# Altium PCB rpi_shield.PcbDoc
Units mm, origin at the board's own origin, x right, y up, seen from the top; angles counter-clockwise.
Board outline 56 x 65 mm, 2 copper layers (Top Layer, Bottom Layer); 18 components, 10 nets, 98 pads, 21 vias.
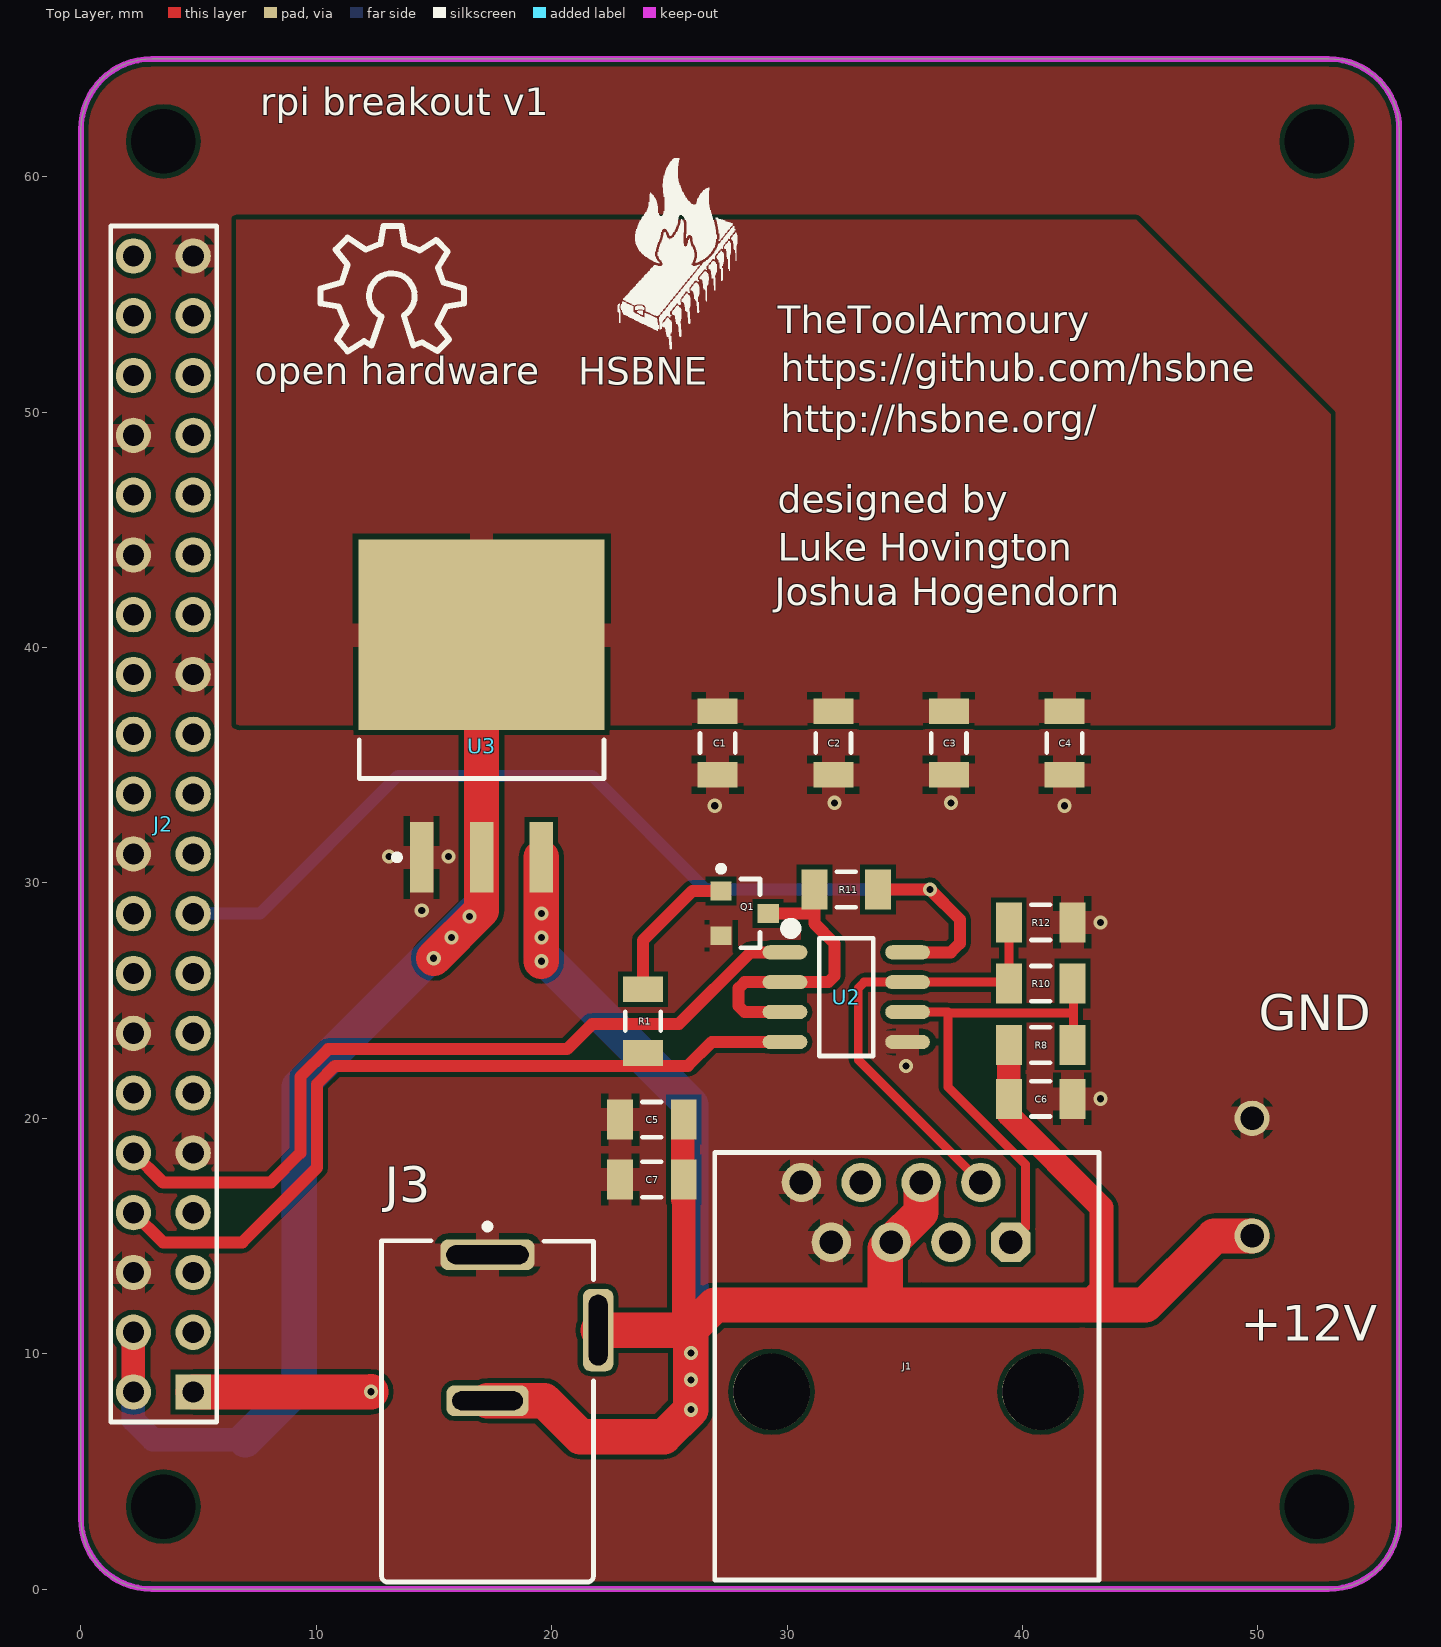
[diagram p0: Top Layer view]
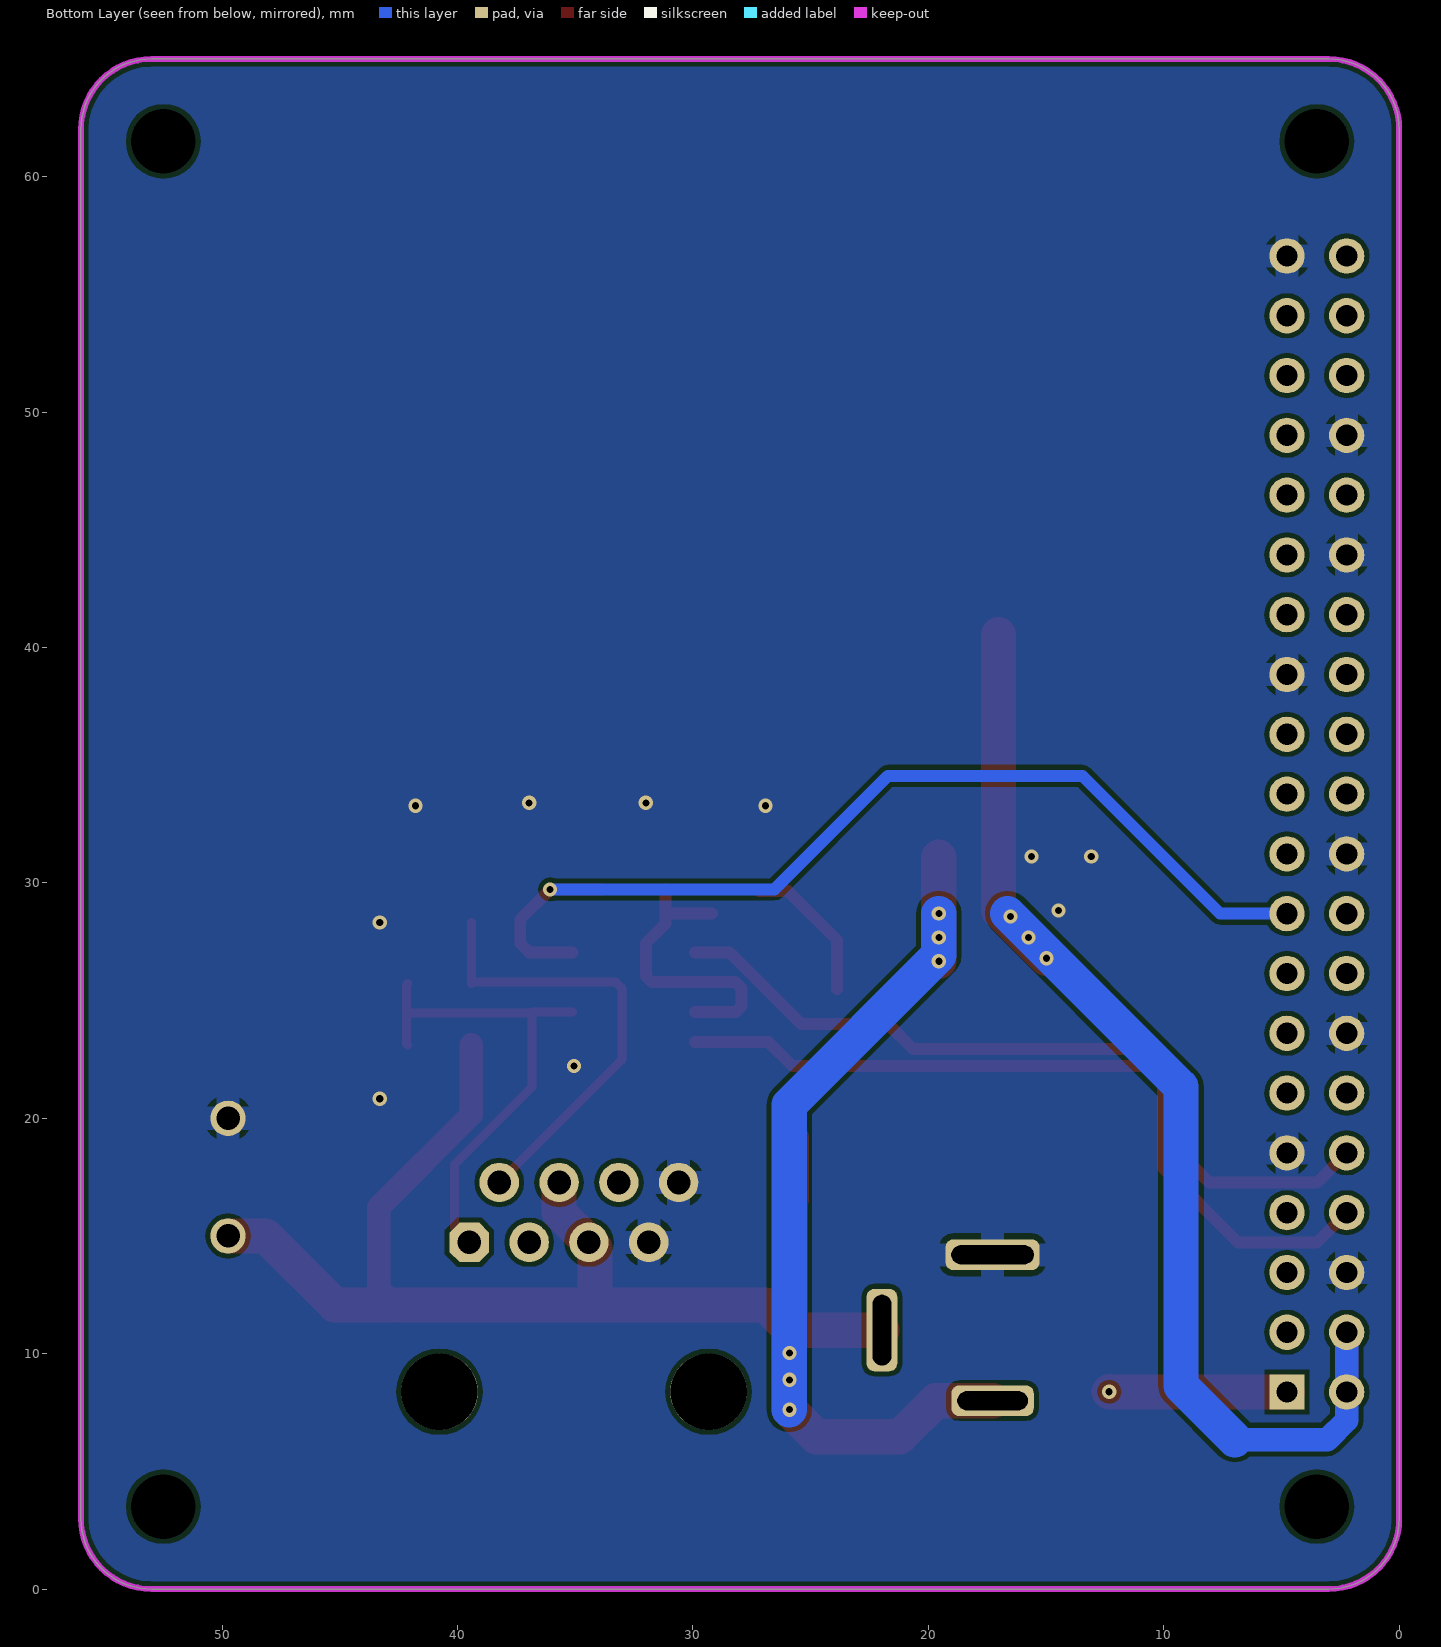
[diagram p1: Bottom Layer view, seen from below]

## Layer stack, top to bottom
Top Solder: solder mask 0.0102, Solder Resist, Dk 3.5
Top Layer: signal copper 0.0356
Dielectric1: dielectric 0.32, FR-4, Dk 4.8
Bottom Layer: signal copper 0.0356
Bottom Solder: solder mask 0.0102, Solder Resist, Dk 3.5

## Board outline
3,0 cw(c3,3) 0,3 0,62 cw(c3,62) 3,65 53,65 cw(c53,62) 56,62 56,3 cw(c53,3) 53,0

## Design rules (kind name [scope] priority, off if disabled: settings)
Clearance [All] p1: gap=0.2
DiffPairsRouting [All] p1: maxlimit=0.254 minlimit=0.254 mostfreqgap=0.254 toplayer_minwidth=0.381 toplayer_maxwidth=0.381 toplayer_prefwidth=0.381 bottomlayer_minwidth=0.381 bottomlayer_maxwidth=0.381 bottomlayer_prefwidth=0.381 maxuncoupledlength=12.7
HoleSize [All] p1: absolutevalues=TRUE maxlimit=4 minlimit=0.3 maxpercent=80.000 minpercent=20.000
MatchedLengths [InDifferentialPair('RS485')] p1: tolerance=2 checknetsindiffpair=FALSE checkdiffpairvsdiffpair=TRUE checkxsignals=TRUE checkothers=TRUE
MinimumSolderMaskSliver [(InComponent('U1') OR InComponent('U4') OR InComponent('Y1'))] p1: minsoldermaskwidth=0.045
MinimumSolderMaskSliver MinimumSolderMaskSliver_1 [All] p2: minsoldermaskwidth=0.25
PolygonConnect PolygonConnect_1 [isvia] p1: connectstyle=Direct reliefconductorwidth=0.254 reliefentries=4 polygonreliefangle="90 Angle" airgapwidth=0.254
PolygonConnect [All] p2: connectstyle=Relief reliefconductorwidth=1 reliefentries=4 polygonreliefangle="90 Angle" airgapwidth=0.254
RoutingVias [All] p1: holewidth=0.3 width=0.5 viastyle="Through Hole" minholewidth=0.2 minwidth=0.5 maxholewidth=0.711 maxwidth=1.27
SilkToSolderMaskClearance [IsPad] p1 off: minsilkscreentomaskgap=0.254 clearancetoexposedcopper=TRUE
SolderMaskExpansion [All] p1: expansion=0.102
Width [All] p1: maxlimit=1.5 minlimit=0.254 preferedwidth=0.508 minimp=50.000000 maximp=50.000000 favimp=50.000000
26 further rules are at their usual default settings.

## Classes and differential pairs
differential pair RS485: +RS485_P -RS485_N

## Components (designator, comment, footprint, x,y, rotation, side; value= is the part's Value field where it differs from the comment)
C1 "100nF" C1206 27.051,35.941 r90 top
C2 "100nF" C1206 31.962,35.941 r90 top
C3 "100nF" C1206 36.872,35.941 r90 top
C4 "1uF" C1206 41.783,35.941 r90 top
C5 "1uF" C1206 24.257,19.939 r0 top
C6 "100nF" C1206 40.767,20.828 r180 top
C7 "100nF" C1206 24.257,17.399 r0 top
J1 "rs485" RJ45 35.052,8.382 r0 top
J2 "rpi" 2x20 4.77,8.37 r180 top locked
J3 "KLDX-0202-A" KYCN-KLDX-0202-A_V 17.272,8.001 r270 top
Q1 "BSS123LT3G" ONSC-SOT-23-3-318-08_V 28.194,28.702 r0 top
R1 "10K" C1206 23.876,24.13 r270 top
R8 "390R" C1206 40.767,23.114 r180 top
R10 "220R" C1206 40.767,25.717 r0 top
R11 "10K" C1206 32.512,29.718 r0 top
R12 "390R" C1206 40.767,28.321 r180 top
U2 "MAX14770EESA+" 8S1_L 32.512,25.146 r0 top
U3 "LM1085ISX-5.0" TS3B_L 17.018,37.084 r90 top

## Footprints (in the part's own frame and the unit in brackets; to place one, negate y for a bottom-side part, rotate by r counter-clockwise, add the part's x,y. Pads: shape width x height; smd on the part's side, far side on the other; paste and mask are expansions set on the pad)
2x20 [mm]
  rect 1.5x1.5 hole 0.9: 1(0,0)
  round 1.5 hole 0.9: 2(2.54,0) 3(0,-2.54) 4(2.54,-2.54) 5(0,-5.08) 6(2.54,-5.08) 7(0,-7.62) 8(2.54,-7.62) 9(0,-10.16) 10(2.54,-10.16) 11(0,-12.7) 12(2.54,-12.7) 13(0,-15.24) 14(2.54,-15.24) 15(0,-17.78) 16(2.54,-17.78) 17(0,-20.32) 18(2.54,-20.32) 19(0,-22.86) 20(2.54,-22.86) 21(0,-25.4) 22(2.54,-25.4) 23(0,-27.94) 24(2.54,-27.94) 25(0,-30.48) 26(2.54,-30.48) 27(0,-33.02) 28(2.54,-33.02) 29(0,-35.56) 30(2.54,-35.56) 31(0,-38.1) 32(2.54,-38.1) 33(0,-40.64) 34(2.54,-40.64) 35(0,-43.18) 36(2.54,-43.18) 37(0,-45.72) 38(2.54,-45.72) 39(0,-48.26) 40(2.54,-48.26)
  silkscreen extent -1,-49.53 3.5,1.27
8S1_L [mm] "SOIC, 8-Leads, Body 4.9x3.9mm, Pitch 1.27mm, IPC High Density"
  oval 1.9x0.6 smd: 1(-2.604,1.905) 2(-2.604,0.635) 3(-2.604,-0.635) 4(-2.604,-1.905) 5(2.604,-1.905) 6(2.604,-0.635) 7(2.604,0.635) 8(2.604,1.905)
  silkscreen extent -2.56,-2.5 1.14,3.12, body extent -2,-2.5 2,2.5, height 1.75
C1206 [mm] "Chip Capacitor, Body 3.2x1.6mm, IPC High Density"
  rect 1.1x1.7 smd: 1(-1.35,0) 2(1.35,0)
  silkscreen extent -0.4,-0.75 0.4,0.75, body extent -1.7,-0.9 1.7,0.9, height 1.3
KYCN-KLDX-0202-A_V [mm] "Power Jack, 3-Leads, Body 14.5x9mm"
  rrect50% 1.3x4 hole 0.8 slot 3.5 at 90 deg: 1(-6.2,0)
  rrect50% 1.3x3.5 hole 0.8 slot 3 at 90 deg: 2(0,0)
  rrect50% 3.5x1.3 hole 0.8 slot 3 at 0 deg: 3(-3,4.7)
  silkscreen extent -7.52,-4.5 7.7,4.5, body extent -6.8,-4.5 7.7,4.9, height 10.8
ONSC-SOT-23-3-318-08_V [mm] "SOT23, 3-Leads, Body 2.92x1.3mm, Pitch 0.95mm"
  rect 0.9x0.8 smd: 1(-1,0.95) 2(-1,-0.95) 3(1,0)
  silkscreen extent -1.12,-1.46 0.65,2.02, body extent -0.65,-1.46 0.65,1.46, height 1.11
RJ45 [mil] "609-5081-ND"
  oct 66x66 hole 39.37: 1(175.04,250)
  round 66 hole 39.37: 2(125.04,350) 3(75.04,250) 4(25.04,350) 5(-24.96,250) 6(-74.96,350) 7(-124.96,250) 8(-174.96,350)
  round 127.95 hole 127.95 unplated: ""(-225.04,0) ""(225.04,0)
  silkscreen extent -320,-315 323,400, body extent -295,-314 303,394, height 452
TS3B_L [mm] "D2-PAK, 4-Leads, Body 8.6x10.2mm, Pitch 2.54mm, Lead Span 14.2mm, IPC High Density"
  rect 3x1 smd: 1(-6,2.54) 2(-6,0) 3(-6,-2.54)
  rect 8.1x10.45 smd: 4(3.45,0)
  silkscreen extent -6.12,-5.2 -1,5.2, body extent -2.65,-5.2 6.24,5.2, height 4.64

## Part data
C1 C2 C3 C6 C7: library part "Cap 100nF", "Capacitor (Semiconductor SIM Model)"
C4 C5: library part "Cap 1uF", "Capacitor (Semiconductor SIM Model)"
J1: library part rj45, "rj45"
J2: library part rpi2, "RaspPi I/O header"
J3: library part CMP-1673-00001-5, "DC Power Jack, 24 V, 3.5 A, -25 to 85 degC, 3-Pin THD, RoHS"
Q1: library part CMP-1058-00787-1, "Power MOSFET, 170 mA, 100 V, N-Channel, 3-Pin SOT-23, Pb-Free, Tape and Reel"
R1 R11: library part Resistor-10K, "Resistor"
R8 R12: library part Resistor-390R, "Resistor"
R10: library part Resistor-220R, "Resistor"
U2: "TXRX PROFIBUS RS-485 8-SOIC"
U3: library part CMP-0062-00621-3, "3A Low Dropout Positive Regulators, 3-pin TO-263"

## Free pads (board coordinates)
  round 1.5 hole 1: 1(49.75,15) 2(49.75,20)
  round 1.524 hole 2.75 unplated: ""(3.5,3.5) ""(3.5,61.5) ""(52.5,3.5) ""(52.5,61.5)

## Via types
v1: diameter 0.6, hole 0.3, Top Layer to Bottom Layer, tented both sides, 21 vias

## Nets (pads, with @x,y where several pads share a name; then routed paths per layer and width w, separated by ;. In a path a pad name is that pad's centre, name@x,y a point inside that pad or via, vN(x,y) a via of type N, cw(c..) or ccw(c..) an arc to the next point about the centre after c; other vN are vias at no path point)
3V3: J2.17 R11.2 U2.8 | length 43.1
  Top Layer w0.508: R11.2 v1(36.068,29.718) 37.338,28.448 37.338,27.432 36.957,27.051 U2.8
  Bottom Layer w0.508: J2.17 7.608,28.69 13.462,34.544 21.717,34.544 26.543,29.718 v1(36.068,29.718)
5V: C1.2 C2.2 C3.2 C4.2 J2.2 J2.4 U3.2 U3.4 | length 52.3
  Top Layer w1: J2.2 J2.4
  Top Layer w1.5: v1(14.986,26.797) 17.018,28.829 U3.2 U3.4
  Bottom Layer w1: J2.4 J2.2 2.23,7.168 3.048,6.35 6.985,6.35
  Bottom Layer w1.5: 6.985,6.35 9.271,8.636 9.271,21.336 v1@16.637,28.702
  other v1: 15.748,27.686 16.51,28.575
12V: C5.2 C6.2 C7.2 J1.4 J1.5 J3.2 J3.3 pad.1 R8.2 U3.3 | length 97.6
  Top Layer w1: C5.2@25.572,19.185 25.572,16.545 25.607,16.51 25.607,11.35 25.908,11.049 ; R8.2 C6.2 39.417,20.146 43.354,16.209 43.354,12.747 42.672,12.065
  Top Layer w1.5: J3.2 19.685,8.001 21.209,6.477 24.765,6.477 v1(25.908,7.62) v1(25.908,8.89) v1(25.908,10.033) 25.908,11.049 ; v1(19.558,26.67) v1(19.558,27.686) v1(19.558,28.702) U3.3 ; J3.3 25.86,11.001 25.908,11.049 ; 35.688,12.066 35.687,12.065 ; J1.4 35.688,16.002 J1.5 34.163,14.477 34.163,12.065 ; 42.418,12.065 35.687,12.065 ; 42.672,12.065 45.212,12.065 48.147,15 pad.1 ; 25.908,11.049 26.924,12.065 34.163,12.065 ; 34.163,12.065 35.687,12.065
  Bottom Layer w1.5: v1(19.558,28.702) v1(19.558,27.686) 19.558,26.924 25.908,20.574 v1(25.908,10.033) v1(25.908,8.89) v1(25.908,7.62)
COM_TR: Q1.3 R11.1 U2.2 U2.3 | length 13.1
  Top Layer w0.508: Q1.3 31.162,28.702 ; U2.3 28.194,24.511 27.94,24.765 27.94,25.527 28.194,25.781 U2.2 31.75,25.781 32.004,26.035 32.004,27.432 31.162,28.274 31.162,28.702 ; R11.1 31.162,28.702
GND: C1.1 C2.1 C3.1 C4.1 C5.1 C6.1 C7.1 J1.7 J1.8 J2.6 J2.9 J2.14 J2.20 J2.25 J2.30 J2.34 J2.39 J3.1 pad.2 Q1.2 R12.1 U2.5 U3.1
  other v1: 43.307,20.828 35.052,22.225 43.307,28.321 14.478,28.829 13.081,31.115 15.621,31.115 26.924,33.274 41.783,33.274 32.004,33.401 36.957,33.401
NetQ1_1: Q1.1 R1.1 | length 6.3
  Top Layer w0.508: R1.1 23.876,27.559 25.969,29.652 Q1.1
RS485_N: J1.1 R8.1 R10.2 U2.6 | length 21.2
  Top Layer w0.381: U2.6 36.83,24.511 ; J1.1 40.132,15.366 40.132,18.034 36.83,21.336 36.83,24.511 ; R8.1 42.164,23.161 42.164,24.384 ; R10.2 42.164,25.67 42.164,24.384 ; 36.83,24.511 36.864,24.477 42.071,24.477 42.164,24.384
RS485_P: J1.2 R10.1 R12.2 U2.7 | length 19.5
  Top Layer w0.381: J1.2 33.02,22.48 33.02,25.527 33.274,25.781 U2.7 39.353,25.781 R10.1 R12.2
RXD: J2.10 U2.1 | length 34.1
  Top Layer w0.508: J2.10 3.488,17.272 8.067,17.272 9.325,18.53 9.325,21.756 10.502,22.933 20.647,22.933 21.717,24.003 25.4,24.003 28.448,27.051 U2.1
TXD: J2.8 R1.2 U2.4 | length 33.8
  Top Layer w0.508: J2.8 3.488,14.732 6.858,14.732 10.033,17.907 10.033,21.463 10.795,22.225 25.781,22.225 26.797,23.241 U2.4
pads on no net: J1. J1.3 J1.6 J2.1 J2.3 J2.5 J2.7 J2.11 J2.12 J2.13 J2.15 J2.16 J2.18 J2.19 J2.21 J2.22 J2.23 J2.24 J2.26 J2.27 J2.28 J2.29 J2.31 J2.32 J2.33 J2.35 J2.36 J2.37 J2.38 J2.40
copper on no net: | length 7.6
  Top Layer w1.5: 4.77,8.37 12.307,8.37 v1(12.319,8.382)

## Polygon pours and split planes (outlines as drawn)
5V on Top Layer "5V" (solid, remove dead copper, pour order 2): 6.604,36.576 6.731,36.703 53.086,36.703 53.086,49.911 44.831,58.166 6.604,58.166
GND on Top Layer "Top Layer-No Net" (solid, remove dead copper, pour order 3): 0,0 56,0 56,65 0,65
GND on Bottom Layer "Top Layer-No Net" (solid, remove dead copper, pour order 4): 0,0 56,0 56,65 0,65

## Keep-outs
Keep-Out Layer:
  the board outline again, w0.254

## Other copper
Top Layer:
  pour cut-out: 30.829,25.781 30.829,23.209 30.607,22.987 30.353,23.241 29.908,23.241
  pour cut-out: 30.412,28.748 30.607,28.553 30.607,26.924 31.414,26.924 31.541,27.051

## Silkscreen, mask and mechanical layers (free items; w line width, h text height)
Top Overlay:
  drawing of 1356 lines, arcs and shapes, not listed
  text "rpi breakout v1" at 7.62,62.23 h2
  text "TheToolArmoury" at 29.591,52.959 h2
  text "https://github.com/hsbne" at 29.718,50.927 h2
  text "open hardware" at 7.391,50.8 h2
  text "HSBNE" at 21.133,50.775 h2
  text "http://hsbne.org/" at 29.718,48.768 h2
  text "designed by" at 29.591,45.339 h2
  text "Luke Hovington" at 29.591,43.307 h2
  text "Joshua Hogendorn" at 29.464,41.402 h2
  text "GND" at 50.038,23.749 h1.52
  text "+12V" at 49.276,10.541 h1.52